# Altium PCB NodeReceive.PcbDoc
Units mm, origin at the board's own origin, x right, y up, seen from the top; angles counter-clockwise.
Board outline 130.56 x 79.5 mm, 2 copper layers (Top Layer, Bottom Layer); 99 components, 34 nets, 312 pads, 24 vias.
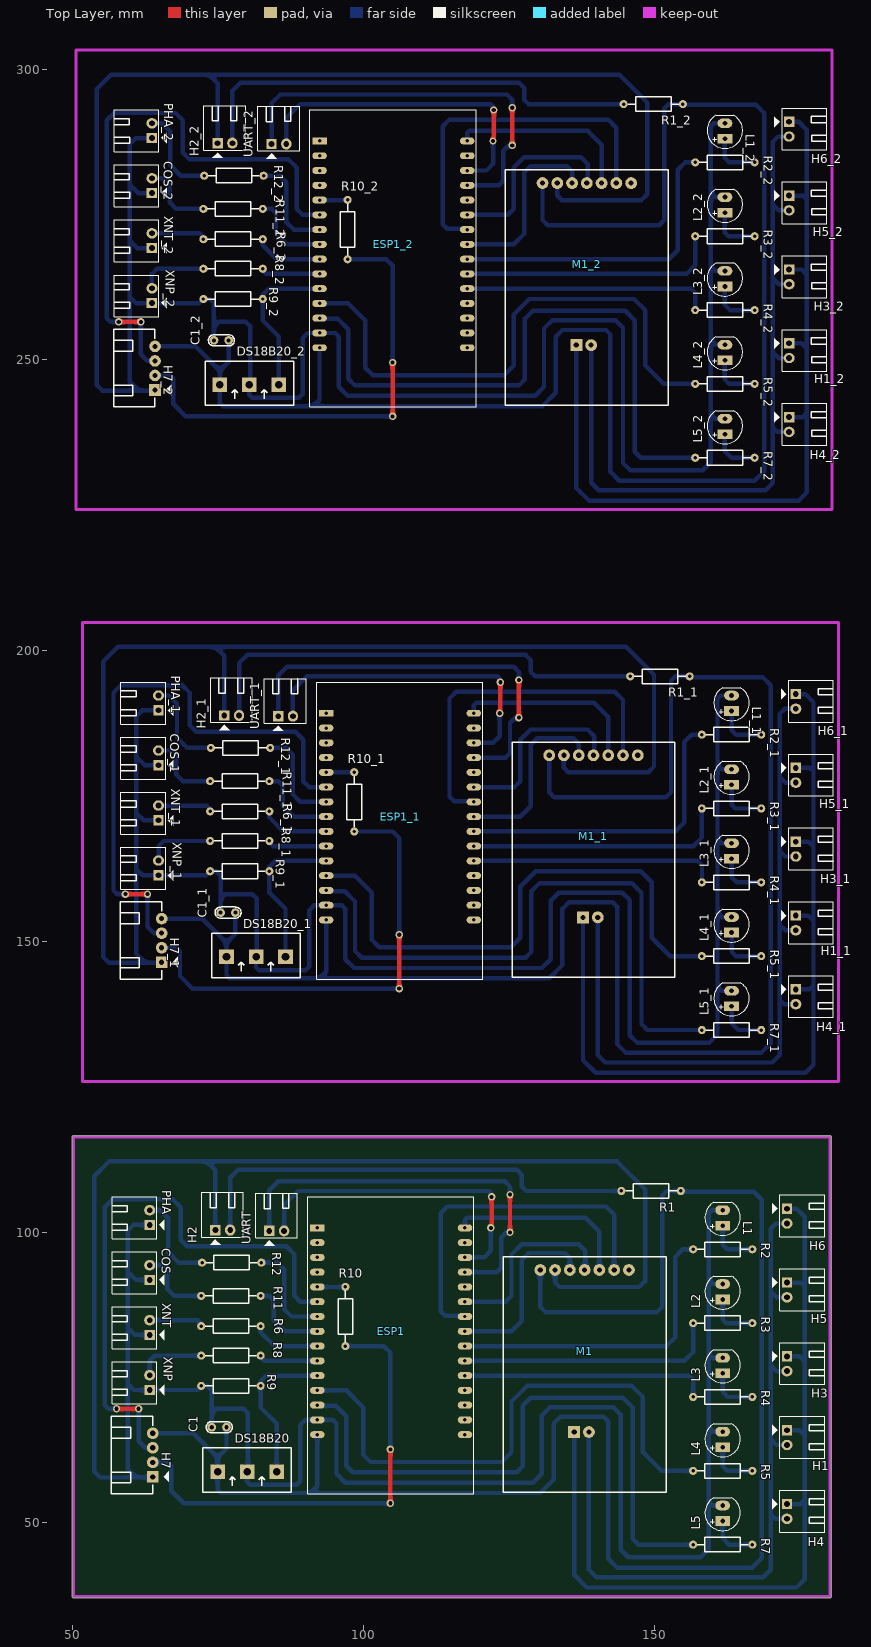
[diagram p0: Top Layer view]
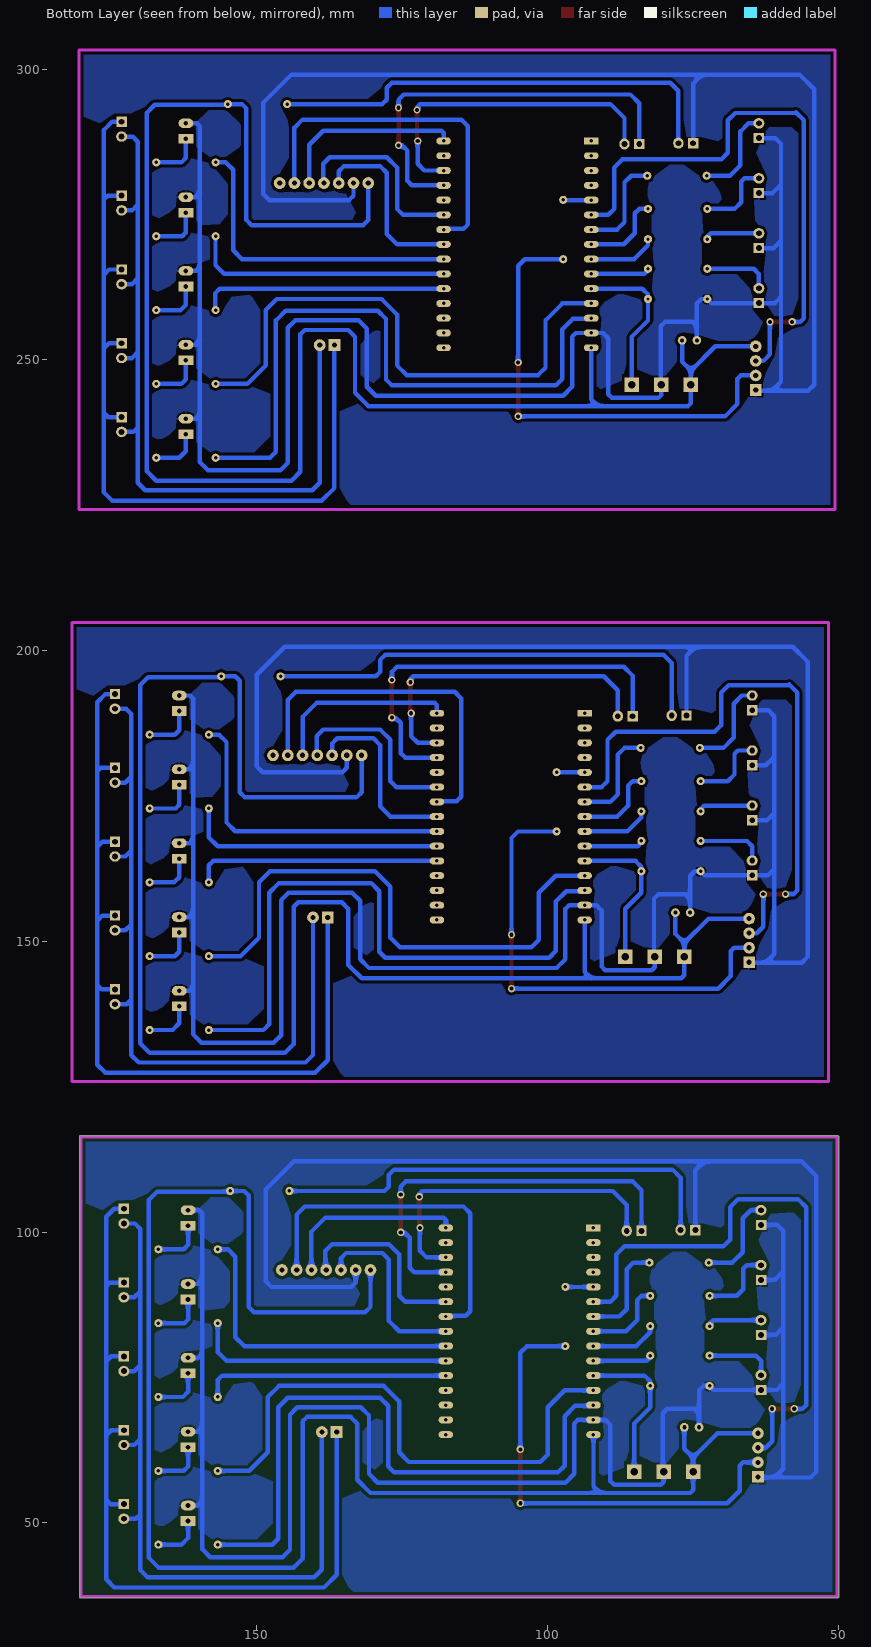
[diagram p1: Bottom Layer view, seen from below]

## Layer stack, top to bottom
Top Solder: solder mask 0.0102, Solder Resist, Dk 3.5
Top Layer: signal copper 0.0356
Dielectric 1: dielectric 0.32, FR-4, Dk 4.8
Bottom Layer: signal copper 0.0356
Bottom Solder: solder mask 0.0102, Solder Resist, Dk 3.5

## Board outline
49.911,37.338 ccw(c50.165,37.338) 50.165,37.084 180.213,37.084 ccw(c180.213,37.338) 180.467,37.338 180.467,116.332 ccw(c180.213,116.332) 180.213,116.586 50.165,116.586 ccw(c50.165,116.332) 49.911,116.332

## Design rules (kind name [scope] priority, off if disabled: settings)
Clearance [All] p1: gap=0.508
PolygonConnect [All] p1: connectstyle=Relief reliefconductorwidth=0.254 reliefentries=4 polygonreliefangle="90 Angle" airgapwidth=0.254
RoutingVias [All] p1: holewidth=0.711 width=1.27 viastyle="Through Hole" minholewidth=0.711 minwidth=1.27 maxholewidth=0.711 maxwidth=1.27
SolderMaskExpansion [All] p1: expansion=0.102
Width [All] p1: maxlimit=1.016 minlimit=0.762 preferedwidth=0.762
30 further rules are at their usual default settings.

## Classes and differential pairs
component class NodeReceive: C1 COS DS18B20 ESP1 H1 H2 H3 H4 H5 H6 H7 L1 L2 L3 L4 L5 L8 L9 L10 M1 PHA R1 R2 R3 R4 R5 R6 R7 R8 R9 R10 R11 R12 R14 R15 UART XNP XNT

## Components (designator, comment, footprint, x,y, rotation, side; value= is the part's Value field where it differs from the comment)
C1 "104" "tu gom" 75.184,66.421 r180 top
C1_1 "104" "tu gom" 76.708,154.94 r180 top (schematic designator C1)
C1_2 "104" "tu gom" 75.565,253.365 r180 top (schematic designator C1)
COS "Header 2P 2.54 Duc Cong" "Header 2P DC 2.54" 63.246,91.757 r180 top
COS_1 "Header 2P 2.54 Duc Cong" "Header 2P DC 2.54" 64.77,180.276 r180 top (schematic designator COS)
COS_2 "Header 2P 2.54 Duc Cong" "Header 2P DC 2.54" 63.627,278.702 r180 top (schematic designator COS)
DS18B20 "KF3" KF3-5.08 74.93,58.801 r0 top
DS18B20_1 "KF3" KF3-5.08 76.454,147.32 r0 top (schematic designator DS18B20)
DS18B20_2 "KF3" KF3-5.08 75.311,245.745 r0 top (schematic designator DS18B20)
ESP1 "ESP32 DEVKIT" "ESP32 WROOM 32 KIT" 92.075,100.711 r0 top
ESP1_1 "ESP32 DEVKIT" "ESP32 WROOM 32 KIT" 93.599,189.23 r0 top (schematic designator ESP1)
ESP1_2 "ESP32 DEVKIT" "ESP32 WROOM 32 KIT" 92.456,287.655 r0 top (schematic designator ESP1)
H1 "Header 2P 2.54 Duc Cong" "Header 2P DC 2.54" 172.847,65.913 r0 top
H1_1 "Header 2P 2.54 Duc Cong" "Header 2P DC 2.54" 174.371,154.432 r0 top (schematic designator H1)
H1_2 "Header 2P 2.54 Duc Cong" "Header 2P DC 2.54" 173.228,252.857 r0 top (schematic designator H1)
H2 "Header 2P 2.54 Duc Cong" "Header 2P DC 2.54" 74.549,100.33 r90 top
H2_1 "Header 2P 2.54 Duc Cong" "Header 2P DC 2.54" 76.073,188.849 r90 top (schematic designator H2)
H2_2 "Header 2P 2.54 Duc Cong" "Header 2P DC 2.54" 74.93,287.274 r90 top (schematic designator H2)
H3 "Header 2P 2.54 Duc Cong" "Header 2P DC 2.54" 172.847,78.613 r0 top
H3_1 "Header 2P 2.54 Duc Cong" "Header 2P DC 2.54" 174.371,167.132 r0 top (schematic designator H3)
H3_2 "Header 2P 2.54 Duc Cong" "Header 2P DC 2.54" 173.228,265.557 r0 top (schematic designator H3)
H4 "Header 2P 2.54 Duc Cong" "Header 2P DC 2.54" 172.847,53.213 r0 top
H4_1 "Header 2P 2.54 Duc Cong" "Header 2P DC 2.54" 174.371,141.732 r0 top (schematic designator H4)
H4_2 "Header 2P 2.54 Duc Cong" "Header 2P DC 2.54" 173.228,240.157 r0 top (schematic designator H4)
H5 "Header 2P 2.54 Duc Cong" "Header 2P DC 2.54" 172.847,91.313 r0 top
H5_1 "Header 2P 2.54 Duc Cong" "Header 2P DC 2.54" 174.371,179.832 r0 top (schematic designator H5)
H5_2 "Header 2P 2.54 Duc Cong" "Header 2P DC 2.54" 173.228,278.257 r0 top (schematic designator H5)
H6 "Header 2P 2.54 Duc Cong" "Header 2P DC 2.54" 172.847,104.013 r0 top
H6_1 "Header 2P 2.54 Duc Cong" "Header 2P DC 2.54" 174.371,192.532 r0 top (schematic designator H6)
H6_2 "Header 2P 2.54 Duc Cong" "Header 2P DC 2.54" 173.228,290.957 r0 top (schematic designator H6)
H7 "Header 4P 2.54 Duc Cong" "Header 4P DC 2.54" 63.754,57.912 r180 top
H7_1 "Header 4P 2.54 Duc Cong" "Header 4P DC 2.54" 65.278,146.431 r180 top (schematic designator H7)
H7_2 "Header 4P 2.54 Duc Cong" "Header 4P DC 2.54" 64.135,244.856 r180 top (schematic designator H7)
L1 "LED 5mm" LED-5MM-Green 161.798,101.219 r90 top
L1_1 "LED 5mm" LED-5MM-Green 163.322,189.738 r90 top (schematic designator L1)
L1_2 "LED 5mm" LED-5MM-Green 162.179,288.163 r90 top (schematic designator L1)
L2 "LED 5mm" LED-5MM-Green 161.798,88.519 r90 top
L2_1 "LED 5mm" LED-5MM-Green 163.322,177.038 r90 top (schematic designator L2)
L2_2 "LED 5mm" LED-5MM-Green 162.179,275.463 r90 top (schematic designator L2)
L3 "LED 5mm" LED-5MM-Green 161.798,75.819 r90 top
L3_1 "LED 5mm" LED-5MM-Green 163.322,164.338 r90 top (schematic designator L3)
L3_2 "LED 5mm" LED-5MM-Green 162.179,262.763 r90 top (schematic designator L3)
L4 "LED 5mm" LED-5MM-Green 161.798,63.119 r90 top
L4_1 "LED 5mm" LED-5MM-Green 163.322,151.638 r90 top (schematic designator L4)
L4_2 "LED 5mm" LED-5MM-Green 162.179,250.063 r90 top (schematic designator L4)
L5 "LED 5mm" LED-5MM-Green 161.798,50.419 r90 top
L5_1 "LED 5mm" LED-5MM-Green 163.322,138.938 r90 top (schematic designator L5)
L5_2 "LED 5mm" LED-5MM-Green 162.179,237.363 r90 top (schematic designator L5)
M1 "MCP2515" MCP2515_MODULE 130.429,93.472 r0 top
M1_1 "MCP2515" MCP2515_MODULE 131.953,181.991 r0 top (schematic designator M1)
M1_2 "MCP2515" MCP2515_MODULE 130.81,280.416 r0 top (schematic designator M1)
PHA "Header 2P 2.54 Duc Cong" "Header 2P DC 2.54" 63.246,101.219 r180 top
PHA_1 "Header 2P 2.54 Duc Cong" "Header 2P DC 2.54" 64.77,189.738 r180 top (schematic designator PHA)
PHA_2 "Header 2P 2.54 Duc Cong" "Header 2P DC 2.54" 63.627,288.163 r180 top (schematic designator PHA)
R1 "0R" "tro vach 1/4w" 149.479,107.061 r0 top
R1_1 "0R" "tro vach 1/4w" 151.003,195.58 r0 top (schematic designator R1)
R1_2 "0R" "tro vach 1/4w" 149.86,294.005 r0 top (schematic designator R1)
R2 "1k" "tro vach 1/4w" 161.798,97.028 r0 top
R2_1 "1k" "tro vach 1/4w" 163.322,185.547 r0 top (schematic designator R2)
R2_2 "1k" "tro vach 1/4w" 162.179,283.972 r0 top (schematic designator R2)
R3 "1k" "tro vach 1/4w" 161.798,84.328 r0 top
R3_1 "1k" "tro vach 1/4w" 163.322,172.847 r0 top (schematic designator R3)
R3_2 "1k" "tro vach 1/4w" 162.179,271.272 r0 top (schematic designator R3)
R4 "1k" "tro vach 1/4w" 161.798,71.628 r0 top
R4_1 "1k" "tro vach 1/4w" 163.322,160.147 r0 top (schematic designator R4)
R4_2 "1k" "tro vach 1/4w" 162.179,258.572 r0 top (schematic designator R4)
R5 "1k" "tro vach 1/4w" 161.798,58.928 r0 top
R5_1 "1k" "tro vach 1/4w" 163.322,147.447 r0 top (schematic designator R5)
R5_2 "1k" "tro vach 1/4w" 162.179,245.872 r0 top (schematic designator R5)
R6 "220" "tro vach 1/4w" 77.216,83.82 r180 top
R6_1 "220" "tro vach 1/4w" 78.74,172.339 r180 top (schematic designator R6)
R6_2 "220" "tro vach 1/4w" 77.597,270.764 r180 top (schematic designator R6)
R7 "1k" "tro vach 1/4w" 161.798,46.228 r0 top
R7_1 "1k" "tro vach 1/4w" 163.322,134.747 r0 top (schematic designator R7)
R7_2 "1k" "tro vach 1/4w" 162.179,233.172 r0 top (schematic designator R7)
R8 "220" "tro vach 1/4w" 77.216,78.74 r180 top
R8_1 "220" "tro vach 1/4w" 78.74,167.259 r180 top (schematic designator R8)
R8_2 "220" "tro vach 1/4w" 77.597,265.684 r180 top (schematic designator R8)
R9 "4.7k" "tro vach 1/4w" 77.216,73.533 r180 top
R9_1 "4.7k" "tro vach 1/4w" 78.74,162.052 r180 top (schematic designator R9)
R9_2 "4.7k" "tro vach 1/4w" 77.597,260.477 r180 top (schematic designator R9)
R10 "1k" "tro vach 1/4w" 96.901,85.471 r90 top
R10_1 "1k" "tro vach 1/4w" 98.425,173.99 r90 top (schematic designator R10)
R10_2 "1k" "tro vach 1/4w" 97.282,272.415 r90 top (schematic designator R10)
R11 "220" "tro vach 1/4w" 77.216,89.027 r180 top
R11_1 "220" "tro vach 1/4w" 78.74,177.546 r180 top (schematic designator R11)
R11_2 "220" "tro vach 1/4w" 77.597,275.971 r180 top (schematic designator R11)
R12 "220" "tro vach 1/4w" 77.343,94.742 r180 top
R12_1 "220" "tro vach 1/4w" 78.867,183.261 r180 top (schematic designator R12)
R12_2 "220" "tro vach 1/4w" 77.724,281.686 r180 top (schematic designator R12)
UART "Header 2P 2.54 Duc Cong" "Header 2P DC 2.54" 83.82,100.203 r90 top
UART_1 "Header 2P 2.54 Duc Cong" "Header 2P DC 2.54" 85.344,188.722 r90 top (schematic designator UART)
UART_2 "Header 2P 2.54 Duc Cong" "Header 2P DC 2.54" 84.201,287.147 r90 top (schematic designator UART)
XNP "Header 2P 2.54 Duc Cong" "Header 2P DC 2.54" 63.246,72.834 r180 top
XNP_1 "Header 2P 2.54 Duc Cong" "Header 2P DC 2.54" 64.77,161.353 r180 top (schematic designator XNP)
XNP_2 "Header 2P 2.54 Duc Cong" "Header 2P DC 2.54" 63.627,259.779 r180 top (schematic designator XNP)
XNT "Header 2P 2.54 Duc Cong" "Header 2P DC 2.54" 63.246,82.296 r180 top
XNT_1 "Header 2P 2.54 Duc Cong" "Header 2P DC 2.54" 64.77,170.815 r180 top (schematic designator XNT)
XNT_2 "Header 2P 2.54 Duc Cong" "Header 2P DC 2.54" 63.627,269.24 r180 top (schematic designator XNT)

## Footprints (in the part's own frame and the unit in brackets; to place one, negate y for a bottom-side part, rotate by r counter-clockwise, add the part's x,y. Pads: shape width x height; smd on the part's side, far side on the other; paste and mask are expansions set on the pad)
"ESP32 WROOM 32 KIT" [mm]
  rect 2.5x1.2 hole 0.6: 1(0,0)
  oval 2.5x1.2 hole 0.6: 2(0,-2.54) 3(0,-5.08) 4(0,-7.62) 5(0,-10.16) 6(0,-12.7) 7(0,-15.24) 8(0,-17.78) 9(0,-20.32) 10(0,-22.86) 11(0,-25.4) 12(0,-27.94) 13(0,-30.48) 14(0,-33.02) 15(0,-35.56) 16(25.4,-35.56) 17(25.4,-33.02) 18(25.4,-30.48) 19(25.4,-27.94) 20(25.4,-25.4) 21(25.4,-22.86) 22(25.4,-20.32) 23(25.4,-17.78) 24(25.4,-15.24) 25(25.4,-12.7) 26(25.4,-10.16) 27(25.4,-7.62) 28(25.4,-5.08) 29(25.4,-2.54) 30(25.4,0)
  silkscreen extent -1.65,-45.72 26.92,5.33, body extent -1.65,-45.6 26.85,5.33, height 10.49
"Header 2P DC 2.54" [mil]
  rect 70x70 hole 39.37 unplated: 1(0,0)
  oval 75x70 hole 39.37 unplated: 2(0,-100)
  silkscreen extent -100,-190 255,93, body extent -50,-190 250,90, height 237
"Header 4P DC 2.54" [mil]
  rect 78.74x78.74 hole 35: 1(-1,1)
  round 78.74 hole 35: 2(-1,-97.43) 3(-1,-195.85) 4(-1,-294.28)
  silkscreen extent -110,-409 280,115, body extent 5,-413 278,123, height 290
KF3-5.08 [mm]
  rect 2.5x2.5 hole 1.3: 1(0,0) 2(5.08,0) 3(10.147,0)
  silkscreen extent -2.54,-3.58 12.7,4.06, body extent -2.42,-3.51 12.58,3.99, height 10
LED-5MM-Green [mil] "LED 2 PIN, 5 ly , Only colour,pin to pin 100mil"
  rect 65x100 hole 32: 1(-5,0)
  oval 65x100 hole 32: 2(100,0)
  silkscreen extent -70,-120 154,120, body extent -69,-120 145,117, height 339
MCP2515_MODULE [mil]
  round 80 hole 35.43: 1(600,0) 2(500,0) 3(400,0) 4(300,0) 5(200,0) 6(100,0) 7(0,0) 9(329.13,-1097.28)
  rect 80x80 hole 35.43: 8(229.13,-1097.28)
  silkscreen extent -251,-1504 851,89, body extent -251,-1496 851,79, height 444
"tro vach 1/4w" [mm]
  round 1.4 hole 0.6: 1(-5.1,0) 2(5.1,0)
  silkscreen extent -4.39,-1.25 4.42,1.25, body extent -5.38,-1.2 5.38,1.2, height 2.41
"tu gom" [mm] "Tu gom mini"
  round 1.5 hole 0.7: 1(-1.27,0) 2(1.27,0)
  silkscreen extent -2.25,-0.97 2.22,0.97, body extent -2.92,-0.85 2.92,0.85, height 6.12

## Part data
C1 C1_1 C1_2: library part "Tu gom 104 50V", "Cắm"
COS COS_1 COS_2 H1 H1_1 H1_2 H2 H2_1 H2_2 H3 H3_1 H3_2 H4 H4_1 H4_2 H5 H5_1 H5_2 H6 H6_1 H6_2 H7 H7_1 H7_2 PHA PHA_1 PHA_2 UART UART_1 UART_2 XNP XNP_1 XNP_2 XNT XNT_1 XNT_2: "Cắm"
ESP1 ESP1_1 ESP1_2: library part "ESP32 WROOM 32 KIT"
L1 L1_1 L1_2 L2 L2_1 L2_2 L3 L3_1 L3_2 L4 L4_1 L4_2 L5 L5_1 L5_2: library part "LED 5mm Xanh La", "Cắm"
R1 R1_1 R1_2: library part "Tro Vach 1/4W 5% 0.11R", "Cắm"
R2 R2_1 R2_2 R3 R3_1 R3_2 R4 R4_1 R4_2 R5 R5_1 R5_2 R6 R6_1 R6_2 R7 R7_1 R7_2 R8 R8_1 R8_2 R10 R10_1 R10_2 R11 R11_1 R11_2 R12 R12_1 R12_2: library part "Tro Vach 1/4W 5% 1k", "Cắm"
R9 R9_1 R9_2: library part "Tro Vach 1/4W 5% 4.7k", "Cắm"

## Via types
v1: diameter 1.27, hole 0.711, Top Layer to Bottom Layer, 24 vias

## Nets (pads, with @x,y where several pads share a name; then routed paths per layer and width w, separated by ;. In a path a pad name is that pad's centre, name@x,y a point inside that pad or via, vN(x,y) a via of type N, cw(c..) or ccw(c..) an arc to the next point about the centre after c; other vN are vias at no path point)
3V3: ESP1.16
5V: C1.1 DS18B20.1 ESP1.15 H7.4 M1.7 R1.2 | length 291.9
  Bottom Layer w0.762: H7.4 70.757,65.387 74.93,61.214 ; C1.1 76.454,62.738 74.93,61.214 ; 90.932,55.118 92.075,56.261 ESP1.15 ; M1.7 130.429,87.122 131.318,86.233 150.495,86.233 151.384,87.122 151.384,106.299 152.146,107.061 R1.2 154.706,106.934 167.132,106.934 168.529,105.537 168.529,43.942 166.878,42.291 143.637,42.291 142.113,43.815 142.113,67.437 141.351,68.199 133.858,68.199 132.715,67.056 132.715,57.404 130.429,55.118 75.438,55.118 74.93,55.626 DS18B20.1 74.93,61.214
COS: ESP1.8 R11.1 | length 14.3
  Bottom Layer w0.762: R11.1 83.82,89.027 84.582,88.265 84.582,84.836 86.487,82.931 ESP1.8
CS: ESP1.23 M1.5 | length 32.2
  Bottom Layer w0.762: ESP1.23 125.476,82.931 127.254,84.709 127.254,95.25 128.397,96.393 134.62,96.393 135.509,95.504 M1.5
DATA: DS18B20.3 ESP1.11 R9.1 | length 26.8
  Bottom Layer w0.762: DS18B20.3 85.077,67.069 82.316,69.83 R9.1 82.316,74.315 83.312,75.311 ESP1.11
ECHO: ESP1.5 R10.2 | length 4.8
  Bottom Layer w0.762: ESP1.5 96.881,90.551 R10.2
GND: C1.2 COS.1 DS18B20.2 ESP1.14 H2.1 H7.1 L1.2 L2.2 L3.2 L4.2 L5.2 M1.6 PHA.1 R9.2 XNP.1 XNT.1 | length 508.2
  Bottom Layer w0.762: 59.627,73.724 60.515,72.834 XNP.1 71.418,72.834 R9.2 73.152,73.533 73.914,72.771 73.914,68.834 ; 59.627,83.376 60.706,82.296 XNT.1 ; 59.627,93.027 60.896,91.757 COS.1 ; PHA.1 60.452,101.219 59.436,100.203 59.436,59.309 60.96,57.785 ; H7.1 63.678,57.785 60.96,57.785 ; C1.2 73.914,68.834 ; H2.1 74.549,110.617 73.025,112.141 ; M1.6 132.969,91.313 133.731,90.551 147.447,90.551 148.463,91.567 148.463,107.315 143.637,112.141 73.025,112.141 ; L5.2 160.02,52.959 159.385,53.594 ; L4.2 160.147,65.659 159.385,66.421 ; L3.2 160.02,78.359 159.385,78.994 ; L2.2 160.147,91.059 159.385,91.821 ; L1.2 159.893,103.759 159.385,103.251 159.385,91.821 ; 60.96,57.785 54.737,57.785 53.721,58.801 53.721,109.601 56.261,112.141 73.025,112.141 ; 73.914,68.834 74.676,69.596 79.375,69.596 80.137,68.834 80.137,58.928 DS18B20.2 80.01,57.023 80.518,56.515 88.519,56.515 89.154,57.15 89.154,66.802 90.043,67.691 ESP1.14 94.742,67.691 95.377,67.056 95.377,58.42 96.901,56.896 129.159,56.896 130.683,58.42 130.683,68.453 132.08,69.85 143.002,69.85 144.272,68.58 144.272,45.339 145.542,44.069 157.988,44.069 159.385,45.466 159.385,53.594 ; 159.385,53.594 159.385,66.421 ; 159.385,66.421 159.385,78.994 ; 159.385,78.994 159.385,91.821
H: H1.2 H3.2 H4.2 H5.2 H6.2 M1.9 | length 130.6
  Bottom Layer w0.762: M1.9 138.789,41.932 140.081,40.64 168.783,40.64 170.053,41.91 170.053,51.435 ; H4.2 170.815,50.673 170.053,51.435 ; H1.2 171.069,63.373 170.053,64.389 ; H3.2 171.069,76.073 170.053,77.089 ; H5.2 171.069,88.773 170.053,89.789 ; H6.2 170.942,101.473 170.053,100.584 170.053,89.789 ; 170.053,51.435 170.053,64.389 ; 170.053,64.389 170.053,77.089 ; 170.053,77.089 170.053,89.789
L: H1.1 H3.1 H4.1 H5.1 H6.1 M1.8 | length 145.2
  Bottom Layer w0.762: M1.8 136.249,41.043 138.43,38.862 174.498,38.862 175.895,40.259 175.895,53.975 ; H4.1 175.133,53.213 175.895,53.975 ; H1.1 175.006,65.913 175.895,65.024 ; H3.1 175.006,78.613 175.895,77.724 ; H5.1 175.26,91.313 175.895,90.678 ; H6.1 174.498,104.013 175.895,102.616 175.895,90.678 ; 175.895,53.975 175.895,65.024 ; 175.895,65.024 175.895,77.724 ; 175.895,77.724 175.895,90.678
LED_CAN1: ESP1.22 R2.1 | length 54.2
  Bottom Layer w0.762: ESP1.22 152.146,80.391 153.67,81.915 153.67,95.758 154.94,97.028 R2.1
LED_CAN2: ESP1.21 R3.1 | length 44.8
  Bottom Layer w0.762: ESP1.21 155.194,77.851 156.698,79.355 R3.1
LED_CAN3: ESP1.20 R4.1 | length 42.5
  Bottom Layer w0.762: ESP1.20 155.956,75.311 156.718,74.549 156.718,71.648 R4.1
LED_CAN4: ESP1.12 R5.1 | length 96.7
  Bottom Layer w0.762: ESP1.12 97.028,72.771 99.949,69.85 99.949,61.722 101.219,60.452 123.825,60.452 125.476,62.103 125.476,70.866 128.143,73.533 146.177,73.533 148.082,71.628 148.082,62.103 151.257,58.928 R5.1
LED_CAN5: ESP1.13 R7.1 | length 109.5
  Bottom Layer w0.762: ESP1.13 92.202,70.104 95.25,70.104 97.028,68.326 97.028,59.817 98.171,58.674 126.365,58.674 127.381,59.69 127.381,70.104 128.778,71.501 144.653,71.501 146.304,69.85 146.304,47.244 147.32,46.228 R7.1
MISO: ESP1.25 M1.4 | length 32.8
  Bottom Layer w0.762: ESP1.25 124.46,88.011 125.476,89.027 125.476,96.139 127.254,97.917 137.033,97.917 138.176,96.774 138.176,93.599 M1.4
MOSI: ESP1.30 M1.3 | length 32.3
  Bottom Layer w0.762: ESP1.30 117.475,102.108 117.856,102.489 138.176,102.489 140.589,100.076 M1.3
NetCOS_2: COS.2 R11.2 | length 13.1
  Bottom Layer w0.762: COS.2 65.722,94.297 66.294,93.726 66.294,90.17 67.437,89.027 R11.2
NetH2_2: H2.2 R1.1 | length 79.6
  Bottom Layer w0.762: H2.2 77.089,109.347 78.486,110.744 126.365,110.744 127.254,109.855 127.254,107.823 128.016,107.061 R1.1
NetH7_2: H7.2 R10.1 | length 80.4
  Top Layer w0.762: v1(104.648,53.34) v1(104.648,62.611)
  Bottom Layer w0.762: H7.2 66.359,60.387 66.929,59.817 66.929,55.499 69.088,53.34 v1(104.648,53.34) ; R10.1 103.525,80.371 104.648,79.248 v1(104.648,62.611)
NetL1_1: L1.1 R2.2 | length 8.7
  Bottom Layer w0.762: L1.1 161.798,97.79 162.56,97.028 R2.2
NetL2_1: L2.1 R3.2 | length 8.8
  Bottom Layer w0.762: L2.1 161.798,84.963 162.433,84.328 R3.2
NetL3_1: L3.1 R4.2 | length 8.6
  Bottom Layer w0.762: L3.1 161.798,72.517 162.687,71.628 R4.2
NetL4_1: L4.1 R5.2 | length 8.7
  Bottom Layer w0.762: L4.1 161.798,59.69 162.56,58.928 R5.2
NetL5_1: L5.1 R7.2 | length 8.5
  Bottom Layer w0.762: L5.1 161.798,47.371 162.941,46.228 R7.2
NetPHA_2: PHA.2 R12.2 | length 16.2
  Bottom Layer w0.762: PHA.2 65.024,103.759 66.421,102.362 66.421,96.52 68.199,94.742 R12.2
NetR6_2: R6.2 XNT.2 | length 9.5
  Bottom Layer w0.762: XNT.2 71.501,84.836 72.116,84.221 R6.2
NetR8_2: R8.2 XNP.2 | length 11.7
  Bottom Layer w0.762: XNP.2 63.246,77.851 64.135,78.74 R8.2
PHA: ESP1.7 R12.1 | length 17.5
  Bottom Layer w0.762: R12.1 85.217,94.742 86.36,93.599 86.36,86.741 87.63,85.471 ESP1.7
RX: ESP1.27 UART.1 | length 70.9
  Top Layer w0.762: v1(125.222,99.949) v1(125.222,106.426)
  Bottom Layer w0.762: UART.1 83.82,107.188 85.344,108.712 124.333,108.712 125.222,107.823 v1(125.222,106.426) ; ESP1.27 122.936,93.091 123.698,93.853 123.698,99.06 124.587,99.949 v1(125.222,99.949)
SCK: ESP1.24 M1.2 | length 61.9
  Bottom Layer w0.762: ESP1.24 117.348,85.598 114.046,85.598 113.284,86.36 113.284,103.251 114.427,104.394 141.732,104.394 143.129,102.997 M1.2
TRIG: ESP1.6 H7.3 | length 100.5
  Top Layer w0.762: v1(57.531,69.596) v1(61.341,69.596)
  Bottom Layer w0.762: v1(57.531,69.596) 56.134,69.596 55.499,70.231 55.499,104.267 56.896,105.664 67.183,105.664 68.58,104.267 68.58,98.679 69.723,97.536 86.741,97.536 88.138,96.139 88.138,89.027 89.154,88.011 ESP1.6 ; v1(61.341,69.596) 61.341,64.008 62.462,62.887 H7.3
TX: ESP1.28 UART.2 | length 56.3
  Top Layer w0.762: v1(121.92,100.711) 122.047,100.838 121.793,101.092 122.047,101.346 v1(122.047,106.045)
  Bottom Layer w0.762: UART.2 86.36,104.648 88.773,107.061 121.539,107.061 122.047,106.553 v1(122.047,106.045) ; ESP1.28 120.777,95.631 121.92,96.774 v1(121.92,100.711)
XNP: ESP1.10 R8.1 | length 10
  Bottom Layer w0.762: R8.1@82.296,78.486 82.931,77.851 ESP1.10
XNT: ESP1.9 R6.1 | length 11.8
  Bottom Layer w0.762: R6.1@82.316,83.8 82.316,82.784 84.709,80.391 ESP1.9
pads on no net: C1_1.1 C1_1.2 C1_2.1 C1_2.2 COS_1.1 COS_1.2 COS_2.1 COS_2.2 DS18B20_1.1 DS18B20_1.2 DS18B20_1.3 DS18B20_2.1 DS18B20_2.2 DS18B20_2.3 ESP1.1 ESP1.2 ESP1.3 ESP1.4 ESP1.17 ESP1.18 ESP1.19 ESP1.26 ESP1.29 ESP1_1.1 ESP1_1.2 ESP1_1.3 ESP1_1.4 ESP1_1.5 ESP1_1.6 ESP1_1.7 ESP1_1.8 ESP1_1.9 ESP1_1.10 ESP1_1.11 ESP1_1.12 ESP1_1.13 ESP1_1.14 ESP1_1.15 ESP1_1.16 ESP1_1.17 ESP1_1.18 ESP1_1.19 ESP1_1.20 ESP1_1.21 ESP1_1.22 ESP1_1.23 ESP1_1.24 ESP1_1.25 ESP1_1.26 ESP1_1.27 ESP1_1.28 ESP1_1.29 ESP1_1.30 ESP1_2.1 ESP1_2.2 ESP1_2.3 ESP1_2.4 ESP1_2.5 ESP1_2.6 ESP1_2.7 ESP1_2.8 ESP1_2.9 ESP1_2.10 ESP1_2.11 ESP1_2.12 ESP1_2.13 ESP1_2.14 ESP1_2.15 ESP1_2.16 ESP1_2.17 ESP1_2.18 ESP1_2.19 ESP1_2.20 ESP1_2.21 ESP1_2.22 ESP1_2.23 ESP1_2.24 ESP1_2.25 ESP1_2.26 ESP1_2.27 ESP1_2.28 ESP1_2.29 ESP1_2.30 H1_1.1 H1_1.2 H1_2.1 H1_2.2 H2_1.1 H2_1.2 H2_2.1 H2_2.2 H3_1.1 H3_1.2 H3_2.1 H3_2.2 H4_1.1 H4_1.2 H4_2.1 H4_2.2 H5_1.1 H5_1.2 H5_2.1 H5_2.2 H6_1.1 H6_1.2 H6_2.1 H6_2.2 H7_1.1 H7_1.2 H7_1.3 H7_1.4 H7_2.1 H7_2.2 H7_2.3 H7_2.4 L1_1.1 L1_1.2 L1_2.1 L1_2.2 L2_1.1 L2_1.2 L2_2.1 L2_2.2 L3_1.1 L3_1.2 L3_2.1 L3_2.2 L4_1.1 L4_1.2 L4_2.1 L4_2.2 L5_1.1 L5_1.2 L5_2.1 L5_2.2 M1.1 M1_1.1 M1_1.2 M1_1.3 M1_1.4 M1_1.5 M1_1.6 M1_1.7 M1_1.8 M1_1.9 M1_2.1 M1_2.2 M1_2.3 M1_2.4 M1_2.5 M1_2.6 M1_2.7 M1_2.8 M1_2.9 PHA_1.1 PHA_1.2 PHA_2.1 PHA_2.2 R1_1.1 R1_1.2 R1_2.1 R1_2.2 R2_1.1 R2_1.2 R2_2.1 R2_2.2 R3_1.1 R3_1.2 R3_2.1 R3_2.2 R4_1.1 R4_1.2 R4_2.1 R4_2.2 R5_1.1 R5_1.2 R5_2.1 R5_2.2 R6_1.1 R6_1.2 R6_2.1 R6_2.2 R7_1.1 R7_1.2 R7_2.1 R7_2.2 R8_1.1 R8_1.2 R8_2.1 R8_2.2 R9_1.1 R9_1.2 R9_2.1 R9_2.2 R10_1.1 R10_1.2 R10_2.1 R10_2.2 R11_1.1 R11_1.2 R11_2.1 R11_2.2 R12_1.1 R12_1.2 R12_2.1 R12_2.2 UART_1.1 UART_1.2 UART_2.1 UART_2.2 XNP_1.1 XNP_1.2 XNP_2.1 XNP_2.2 XNT_1.1 XNT_1.2 XNT_2.1 XNT_2.2
copper on no net: | length 4299.3
  Top Layer w0.762: v1(57.912,256.54) v1(61.722,256.54) ; v1(59.055,158.115) v1(62.865,158.115) ; v1(105.029,240.284) v1(105.029,249.555) ; v1(106.172,141.859) v1(106.172,151.13) ; v1(122.301,287.655) 122.428,287.782 122.174,288.036 122.428,288.29 v1(122.428,292.989) ; v1(123.444,189.23) 123.571,189.357 123.317,189.611 123.571,189.865 v1(123.571,194.564) ; v1(125.603,286.893) v1(125.603,293.37) ; v1(126.746,188.468) v1(126.746,194.945)
  Bottom Layer w0.762: v1(57.912,256.54) 56.515,256.54 55.88,257.175 55.88,291.211 57.277,292.608 57.412,292.473 67.699,292.473 68.961,291.211 68.961,285.623 70.104,284.48 87.122,284.48 88.519,283.083 88.519,275.971 89.535,274.955 92.456,274.955 ; v1(59.055,158.115) 57.658,158.115 57.023,158.75 57.023,192.786 58.42,194.183 58.555,194.048 68.842,194.048 70.104,192.786 70.104,187.198 71.247,186.055 88.265,186.055 89.662,184.658 89.662,177.546 90.678,176.53 93.599,176.53 ; 60.008,260.667 60.896,259.779 63.627,259.779 71.799,259.779 72.497,260.477 73.533,260.477 74.295,259.715 74.295,255.778 ; 60.008,270.32 61.087,269.24 63.627,269.24 ; 60.008,279.971 61.277,278.702 63.627,278.702 ; 61.151,162.243 62.039,161.353 64.77,161.353 72.942,161.353 73.64,162.052 74.676,162.052 75.438,161.29 75.438,157.353 ; 61.151,171.894 62.23,170.815 64.77,170.815 ; 61.151,181.546 62.42,180.276 64.77,180.276 ; v1(61.722,256.54) 61.722,250.952 62.843,249.831 64.16,249.831 ; v1(62.865,158.115) 62.865,152.527 63.986,151.406 65.303,151.406 ; 63.627,262.318 63.627,264.795 64.516,265.684 72.497,265.684 ; 63.627,271.78 71.882,271.78 72.497,271.165 72.497,270.764 ; 63.627,281.241 66.103,281.241 66.675,280.67 66.675,277.114 67.818,275.971 72.497,275.971 ; 63.627,288.163 60.833,288.163 59.817,287.147 59.817,246.253 61.341,244.729 ; 63.627,290.703 65.405,290.703 66.802,289.306 66.802,283.464 68.58,281.686 72.624,281.686 ; 64.16,244.831 64.059,244.729 61.341,244.729 ; 64.16,247.331 66.74,247.331 67.31,246.761 67.31,242.443 69.469,240.284 v1(105.029,240.284) ; 64.16,252.331 71.138,252.331 75.311,248.158 ; 64.77,163.893 64.77,166.37 65.659,167.259 73.64,167.259 ; 64.77,173.355 73.025,173.355 73.64,172.74 73.64,172.339 ; 64.77,182.816 67.246,182.816 67.818,182.245 67.818,178.689 68.961,177.546 73.64,177.546 ; 64.77,189.738 61.976,189.738 60.96,188.722 60.96,147.828 62.484,146.304 ; 64.77,192.278 66.548,192.278 67.945,190.881 67.945,185.039 69.723,183.261 73.767,183.261 ; 65.303,146.406 65.202,146.304 62.484,146.304 ; 65.303,148.906 67.883,148.906 68.453,148.336 68.453,144.018 70.612,141.859 v1(106.172,141.859) ; 65.303,153.906 72.281,153.906 76.454,149.733 ; 74.295,253.365 74.295,255.778 ; 74.93,287.274 74.93,297.561 73.406,299.085 ; 75.438,154.94 75.438,157.353 ; 76.073,188.849 76.073,199.136 74.549,200.66 ; 76.835,253.365 76.835,249.682 75.311,248.158 ; 77.47,287.274 77.47,296.291 78.867,297.688 126.746,297.688 127.635,296.799 127.635,294.767 128.397,294.005 144.76,294.005 ; 77.978,154.94 77.978,151.257 76.454,149.733 ; 78.613,188.849 78.613,197.866 80.01,199.263 127.889,199.263 128.778,198.374 128.778,196.342 129.54,195.58 145.903,195.58 ; 82.677,265.43 83.312,264.795 92.456,264.795 ; 82.697,270.744 82.697,269.728 85.09,267.335 92.456,267.335 ; 82.697,275.971 84.201,275.971 84.963,275.209 84.963,271.78 86.868,269.875 92.456,269.875 ; 82.824,281.686 85.598,281.686 86.741,280.543 86.741,273.685 88.011,272.415 92.456,272.415 ; 83.82,167.005 84.455,166.37 93.599,166.37 ; 83.84,172.319 83.84,171.303 86.233,168.91 93.599,168.91 ; 83.84,177.546 85.344,177.546 86.106,176.784 86.106,173.355 88.011,171.45 93.599,171.45 ; 83.967,183.261 86.741,183.261 87.884,182.118 87.884,175.26 89.154,173.99 93.599,173.99 ; 84.201,287.147 84.201,294.132 85.725,295.656 124.714,295.656 125.603,294.767 v1(125.603,293.37) ; 85.344,188.722 85.344,195.707 86.868,197.231 125.857,197.231 126.746,196.342 v1(126.746,194.945) ; 85.458,245.745 85.458,254.013 82.697,256.774 82.697,260.477 82.697,261.259 83.693,262.255 92.456,262.255 ; 86.601,147.32 86.601,155.588 83.84,158.349 83.84,162.052 83.84,162.834 84.836,163.83 93.599,163.83 ; 86.741,287.147 86.741,291.592 89.154,294.005 121.92,294.005 122.428,293.497 v1(122.428,292.989) ; 87.884,188.722 87.884,193.167 90.297,195.58 123.063,195.58 123.571,195.072 v1(123.571,194.564) ; 91.313,242.062 92.456,243.205 92.456,252.095 ; 92.456,143.637 93.599,144.78 93.599,153.67 ; 92.456,257.175 92.583,257.048 95.631,257.048 97.409,255.27 97.409,246.761 98.552,245.618 126.746,245.618 127.762,246.634 127.762,257.048 129.159,258.445 145.034,258.445 146.685,256.794 146.685,234.188 147.701,233.172 157.079,233.172 ; 92.456,259.715 97.409,259.715 100.33,256.794 100.33,248.666 101.6,247.396 124.206,247.396 125.857,249.047 125.857,257.81 128.524,260.477 146.558,260.477 148.463,258.572 148.463,249.047 151.638,245.872 157.079,245.872 ; 92.456,277.495 97.262,277.495 97.282,277.515 ; 93.599,158.75 93.726,158.623 96.774,158.623 98.552,156.845 98.552,148.336 99.695,147.193 127.889,147.193 128.905,148.209 128.905,158.623 130.302,160.02 146.177,160.02 147.828,158.369 147.828,135.763 148.844,134.747 158.222,134.747 ; 93.599,161.29 98.552,161.29 101.473,158.369 101.473,150.241 102.743,148.971 125.349,148.971 127,150.622 127,159.385 129.667,162.052 147.701,162.052 149.606,160.147 149.606,150.622 152.781,147.447 158.222,147.447 ; 93.599,179.07 98.405,179.07 98.425,179.09 ; 97.282,267.315 103.906,267.315 105.029,266.192 v1(105.029,249.555) ; 98.425,168.89 105.049,168.89 106.172,167.767 v1(106.172,151.13) ; 117.856,262.255 156.337,262.255 157.099,261.493 157.099,258.592 157.079,258.572 ; 117.856,264.795 155.575,264.795 157.079,266.299 157.079,271.272 ; 117.856,267.335 152.527,267.335 154.051,268.859 154.051,282.702 155.321,283.972 157.079,283.972 ; 117.856,269.875 125.857,269.875 127.635,271.653 127.635,282.194 128.778,283.337 135.001,283.337 135.89,282.448 135.89,280.416 ; 117.856,272.415 117.729,272.542 114.427,272.542 113.665,273.304 113.665,290.195 114.808,291.338 142.113,291.338 143.51,289.941 143.51,280.416 ; 117.856,274.955 124.841,274.955 125.857,275.971 125.857,283.083 127.635,284.861 137.414,284.861 138.557,283.718 138.557,280.543 138.43,280.416 ; 117.856,280.035 123.317,280.035 124.079,280.797 124.079,286.004 124.968,286.893 v1(125.603,286.893) ; 117.856,282.575 121.158,282.575 122.301,283.718 v1(122.301,287.655) ; 117.856,287.655 117.856,289.052 118.237,289.433 138.557,289.433 140.97,287.02 140.97,280.416 ; 118.999,163.83 157.48,163.83 158.242,163.068 158.242,160.167 158.222,160.147 ; 118.999,166.37 156.718,166.37 158.222,167.874 158.222,172.847 ; 118.999,168.91 153.67,168.91 155.194,170.434 155.194,184.277 156.464,185.547 158.222,185.547 ; 118.999,171.45 127,171.45 128.778,173.228 128.778,183.769 129.921,184.912 136.144,184.912 137.033,184.023 137.033,181.991 ; 118.999,173.99 118.872,174.117 115.57,174.117 114.808,174.879 114.808,191.77 115.951,192.913 143.256,192.913 144.653,191.516 144.653,181.991 ; 118.999,176.53 125.984,176.53 127,177.546 127,184.658 128.778,186.436 138.557,186.436 139.7,185.293 139.7,182.118 139.573,181.991 ; 118.999,181.61 124.46,181.61 125.222,182.372 125.222,187.579 126.111,188.468 v1(126.746,188.468) ; 118.999,184.15 122.301,184.15 123.444,185.293 v1(123.444,189.23) ; 118.999,189.23 118.999,190.627 119.38,191.008 139.7,191.008 142.113,188.595 142.113,181.991 ; 130.81,280.416 130.81,274.066 131.699,273.177 150.876,273.177 151.765,274.066 151.765,293.243 152.527,294.005 154.96,294.005 155.087,293.878 167.513,293.878 168.91,292.481 168.91,230.886 167.259,229.235 144.018,229.235 142.494,230.759 142.494,254.381 141.732,255.143 134.239,255.143 133.096,254 133.096,244.348 130.81,242.062 75.819,242.062 75.311,242.57 75.311,245.745 75.311,248.158 ; 131.953,181.991 131.953,175.641 132.842,174.752 152.019,174.752 152.908,175.641 152.908,194.818 153.67,195.58 156.103,195.58 156.23,195.453 168.656,195.453 170.053,194.056 170.053,132.461 168.402,130.81 145.161,130.81 143.637,132.334 143.637,155.956 142.875,156.718 135.382,156.718 134.239,155.575 134.239,145.923 131.953,143.637 76.962,143.637 76.454,144.145 76.454,147.32 76.454,149.733 ; 133.35,280.416 133.35,278.257 134.112,277.495 147.828,277.495 148.844,278.511 148.844,294.259 144.018,299.085 73.406,299.085 ; 134.493,181.991 134.493,179.832 135.255,179.07 148.971,179.07 149.987,180.086 149.987,195.834 145.161,200.66 74.549,200.66 ; 136.63,252.545 136.63,227.987 138.811,225.806 174.879,225.806 176.276,227.203 176.276,240.919 ; 137.773,154.12 137.773,129.562 139.954,127.381 176.022,127.381 177.419,128.778 177.419,142.494 ; 139.17,252.545 139.17,228.876 140.462,227.584 169.164,227.584 170.434,228.854 170.434,238.379 ; 140.313,154.12 140.313,130.451 141.605,129.159 170.307,129.159 171.577,130.429 171.577,139.954 ; 162.179,237.236 162.179,234.315 163.322,233.172 167.279,233.172 ; 162.179,239.903 160.401,239.903 159.766,240.538 ; 162.179,249.936 162.179,246.634 162.941,245.872 167.279,245.872 ; 162.179,252.603 160.528,252.603 159.766,253.365 ; 162.179,262.636 162.179,259.461 163.068,258.572 167.279,258.572 ; 162.179,265.303 160.401,265.303 159.766,265.938 ; 162.179,275.336 162.179,271.907 162.814,271.272 167.279,271.272 ; 162.179,278.003 160.528,278.003 159.766,278.765 ; 162.179,288.036 162.179,284.734 162.941,283.972 167.279,283.972 ; 162.179,290.703 160.274,290.703 159.766,290.195 159.766,278.765 ; 163.322,138.811 163.322,135.89 164.465,134.747 168.422,134.747 ; 163.322,141.478 161.544,141.478 160.909,142.113 ; 163.322,151.511 163.322,148.209 164.084,147.447 168.422,147.447 ; 163.322,154.178 161.671,154.178 160.909,154.94 ; 163.322,164.211 163.322,161.036 164.211,160.147 168.422,160.147 ; 163.322,166.878 161.544,166.878 160.909,167.513 ; 163.322,176.911 163.322,173.482 163.957,172.847 168.422,172.847 ; 163.322,179.578 161.671,179.578 160.909,180.34 ; 163.322,189.611 163.322,186.309 164.084,185.547 168.422,185.547 ; 163.322,192.278 161.417,192.278 160.909,191.77 160.909,180.34 ; 173.228,237.617 171.196,237.617 170.434,238.379 ; 173.228,240.157 175.514,240.157 176.276,240.919 ; 173.228,250.317 171.45,250.317 170.434,251.333 ; 173.228,252.857 175.387,252.857 176.276,251.968 ; 173.228,263.017 171.45,263.017 170.434,264.033 ; 173.228,265.557 175.387,265.557 176.276,264.668 ; 173.228,275.717 171.45,275.717 170.434,276.733 ; 173.228,278.257 175.641,278.257 176.276,277.622 ; 173.228,288.417 171.323,288.417 170.434,287.528 170.434,276.733 ; 173.228,290.957 174.879,290.957 176.276,289.56 176.276,277.622 ; 174.371,139.192 172.339,139.192 171.577,139.954 ; 174.371,141.732 176.657,141.732 177.419,142.494 ; 174.371,151.892 172.593,151.892 171.577,152.908 ; 174.371,154.432 176.53,154.432 177.419,153.543 ; 174.371,164.592 172.593,164.592 171.577,165.608 ; 174.371,167.132 176.53,167.132 177.419,166.243 ; 174.371,177.292 172.593,177.292 171.577,178.308 ; 174.371,179.832 176.784,179.832 177.419,179.197 ; 174.371,189.992 172.466,189.992 171.577,189.103 171.577,178.308 ; 174.371,192.532 176.022,192.532 177.419,191.135 177.419,179.197 ; 61.341,244.729 55.118,244.729 54.102,245.745 54.102,296.545 56.642,299.085 73.406,299.085 ; 62.484,146.304 56.261,146.304 55.245,147.32 55.245,198.12 57.785,200.66 74.549,200.66 ; 74.295,255.778 75.057,256.54 79.756,256.54 80.518,255.778 80.518,245.872 80.391,245.745 80.391,243.967 80.899,243.459 88.9,243.459 89.535,244.094 89.535,253.746 90.424,254.635 92.456,254.635 95.123,254.635 95.758,254 95.758,245.364 97.282,243.84 129.54,243.84 131.064,245.364 131.064,255.397 132.461,256.794 143.383,256.794 144.653,255.524 144.653,232.283 145.923,231.013 158.369,231.013 159.766,232.41 159.766,240.538 ; 75.438,157.353 76.2,158.115 80.899,158.115 81.661,157.353 81.661,147.447 81.534,147.32 81.534,145.542 82.042,145.034 90.043,145.034 90.678,145.669 90.678,155.321 91.567,156.21 93.599,156.21 96.266,156.21 96.901,155.575 96.901,146.939 98.425,145.415 130.683,145.415 132.207,146.939 132.207,156.972 133.604,158.369 144.526,158.369 145.796,157.099 145.796,133.858 147.066,132.588 159.512,132.588 160.909,133.985 160.909,142.113 ; 159.766,240.538 159.766,253.365 ; 159.766,253.365 159.766,265.938 ; 159.766,265.938 159.766,278.765 ; 160.909,142.113 160.909,154.94 ; 160.909,154.94 160.909,167.513 ; 160.909,167.513 160.909,180.34 ; 170.434,238.379 170.434,251.333 ; 170.434,251.333 170.434,264.033 ; 170.434,264.033 170.434,276.733 ; 171.577,139.954 171.577,152.908 ; 171.577,152.908 171.577,165.608 ; 171.577,165.608 171.577,178.308 ; 176.276,240.919 176.276,251.968 ; 176.276,251.968 176.276,264.668 ; 176.276,264.668 176.276,277.622 ; 177.419,142.494 177.419,153.543 ; 177.419,153.543 177.419,166.243 ; 177.419,166.243 177.419,179.197

## Polygon pours and split planes (outlines as drawn)
GND on Bottom Layer "Bottom Layer-No Net" (solid, remove dead copper, pour order 18): 50.165,116.332 180.213,116.332 180.213,37.338 50.165,37.338
no net on Bottom Layer "Bottom Layer-No Net" (solid, remove dead copper, pour order 24): 51.689,204.851 181.737,204.851 181.737,125.857 51.689,125.857
no net on Bottom Layer "Bottom Layer-No Net" (solid, remove dead copper, pour order 26): 50.546,303.276 180.594,303.276 180.594,224.282 50.546,224.282

## Keep-outs
Keep-Out Layer:
  lines w0.508: 50.165,37.338 180.213,37.338 180.213,116.332 50.165,116.332 50.165,37.338 ; 50.546,224.282 50.546,303.276 180.594,303.276 180.594,224.282 50.546,224.282 ; 51.689,125.857 51.689,204.851 181.737,204.851 181.737,125.857 51.689,125.857